# EAGLE board shieldV0ben (EAGLE 8.7.1)

Size 160 x 100 mm. Coordinates in mm from the lower left corner, seen from the top.
Outline: 0,0 160,0 160,100 0,100 0,0
Copper layers (1*16): Top 0.035mm / dielectric 1.5mm / Bottom 0.035mm
Design rules "default": minimum track width 6mil, minimum drill 0.35mm, track to track 6mil, track to pad 6mil, pad to pad 6mil, via to via 6mil, smd to smd 6mil, copper to edge 40mil, drill to drill 6mil, minimum pad ring 10mil, minimum via ring 8mil, stop-mask expansion 4mil, vias tented up to drill 0mil, thermal gap 10mil

## Footprints (pad centres in the part's own frame; a part is rotated, then mirrored left to right if it is on the bottom)
ARDUINO_MEGA_EDIT = drill 1.016 pad 1.88: 0 13.97,24.13; 1 11.43,24.13; 2 8.89,24.13; 3 6.35,24.13; 3.3V -13.97,-24.13; 4 3.81,24.13; 5 1.27,24.13; 5V@0 -11.43,-24.13; 5V@1 44.45,24.13; 5V@2 46.99,24.13; 6 -1.27,24.13; 7 -3.81,24.13; 8 -7.874,24.13; 9 -10.414,24.13; 10 -12.954,24.13; 11 -15.494,24.13; 12 -18.034,24.13; 13 -20.574,24.13; 14 19.05,24.13; 15 21.59,24.13; 16 24.13,24.13; 17 26.67,24.13; 18 29.21,24.13; 19 31.75,24.13; 20 34.29,24.13; 21 36.83,24.13; A0 1.27,-24.13; A1 3.81,-24.13; A2 6.35,-24.13; A3 8.89,-24.13; A4 11.43,-24.13; A5 13.97,-24.13; A6 16.51,-24.13; A7 19.05,-24.13; A8 24.13,-24.13; A9 26.67,-24.13; A10 29.21,-24.13; A11 31.75,-24.13; A12 34.29,-24.13; A13 36.83,-24.13; A14 39.37,-24.13; A15 41.91,-24.13; AREF -25.654,24.13; GND@0 -8.89,-24.13; GND@1 -6.35,-24.13; GND@2 44.45,-19.05; GND@3 46.99,-19.05; GND@4 -23.114,24.13; RESET -16.51,-24.13; VIN -3.81,-24.13 | hole 3.2: -34.29,24.13; -35.56,-24.13; 16.51,-19.05; 40.64,24.13; 46.99,-24.13
DPAK = smd 0.94 x 1.702: 1 -2.25,-6.109; 2 2.25,-6.109 | smd 6.655 x 7.722: 3 0,0
POWER_JACK_PTH = drill 2.997 pad 4.318: GND 0,7.7; GNDBREAK 4.7,10.7; PWR 0,13.7
2X5-SHROUDED = drill 1.016 pad 1.88: 1 -1.27,5.08; 2 1.27,5.08; 3 -1.27,2.54; 4 1.27,2.54; 5 -1.27,0; 6 1.27,0; 7 -1.27,-2.54; 8 1.27,-2.54; 9 -1.27,-5.08; 10 1.27,-5.08
0805 = smd 0.8 x 1.2: 1 -0.9,0; 2 0.9,0
0805-4K = smd 0.8 x 1.2: 1 -0.9,0; 2 0.9,0
0805-ARV_EDIT = smd 0.65 x 1: 1 -1.905,-1; 2 -0.635,-1; 3 0.635,-1; 4 1.905,-1; 5 1.905,1; 6 0.635,1; 7 -0.635,1; 8 -1.905,1
SOIC8 = smd 0.5 x 2.2: 1 -1.905,-3.154; 2 -0.645,-3.154; 3 0.625,-3.154; 4 1.895,-3.154; 5 1.905,3.154; 6 0.635,3.154; 7 -0.635,3.154; 8 -1.905,3.154
DBV5 = smd 1.473 x 0.559: 1 -1.118,0.95; 2 -1.118,0; 3 -1.118,-0.95; 4 1.118,-0.95; 5 1.118,0.95
W237-4 = drill 1.194 long: 1 -7.5,-1.27; 2 -2.5,-1.27; 3 2.5,-1.27; 4 7.5,-1.27

## Placement (x,y rotation side)
B2  ARDUINO_MEGA_R3_EDIT  [ARDUINO_MEGA_EDIT]  82.55,52.07 0 top
CR1  L7805CDT-TR  [DPAK]  50.8,62.23 180 top
J1  POWER_JACK  [POWER_JACK_PTH]  40.64,36.83 270 top
J2  AVR_SPI_PROG_5X2_NEWPTH2  [2X5-SHROUDED]  119.38,83.82 90 top
J3  AVR_SPI_PROG_5X2_NEWPTH2  [2X5-SHROUDED]  121.92,20.32 270 top
J4  AVR_SPI_PROG_5X2_NEWPTH2  [2X5-SHROUDED]  97.79,83.82 90 top
J5  AVR_SPI_PROG_5X2_NEWPTH2  [2X5-SHROUDED]  100.33,20.32 270 top
J6  AVR_SPI_PROG_5X2_NEWPTH2  [2X5-SHROUDED]  76.2,83.82 90 top
J7  AVR_SPI_PROG_5X2_NEWPTH2  [2X5-SHROUDED]  78.74,20.32 270 top
J8  AVR_SPI_PROG_5X2_NEWPTH2  [2X5-SHROUDED]  54.61,83.82 90 top
J9  AVR_SPI_PROG_5X2_NEWPTH2  [2X5-SHROUDED]  57.15,20.32 270 top
OPAMP1:R1  1k  [0805]  43.18,52.07 180 top
OPAMP1:R2  1k  [0805]  43.18,54.61 180 top
OPAMP1:R7  4k  [0805-4K]  35.56,49.53 180 top
OPAMP1:R8  4k  [0805-4K]  35.56,46.99 180 top
OPAMP1:R9  4k  [0805-4K]  35.56,44.45 0 top
OPAMP1:R10  4k  [0805-4K]  50.8,44.45 0 top
OPAMP1:RN1  4k  [0805-ARV_EDIT]  3.81,-3.81 0 top
OPAMP1:U$1  MCP6002SMT  [SOIC8]  43.18,48.26 270 top
OPAMP2:R1  1k  [0805]  64.77,52.07 180 top
OPAMP2:R2  1k  [0805]  64.77,54.61 180 top
OPAMP2:R7  4k  [0805-4K]  55.88,48.26 0 top
OPAMP2:R8  4k  [0805-4K]  55.88,45.72 0 top
OPAMP2:R9  4k  [0805-4K]  55.88,43.18 0 top
OPAMP2:R10  4k  [0805-4K]  71.12,43.18 180 top
OPAMP2:RN1  4k  [0805-ARV_EDIT]  3.81,-10.16 0 top  (outside the outline)
OPAMP2:U$1  MCP6002SMT  [SOIC8]  63.5,46.99 270 top
OPAMP3:R1  1k  [0805]  72.39,64.77 180 top
OPAMP3:R2  1k  [0805]  72.39,67.31 0 top
OPAMP3:R7  4k  [0805-4K]  64.77,62.23 0 top
OPAMP3:R8  4k  [0805-4K]  64.77,59.69 0 top
OPAMP3:R9  4k  [0805-4K]  64.77,57.15 0 top
OPAMP3:R10  4k  [0805-4K]  80.01,57.15 0 top
OPAMP3:RN1  4k  [0805-ARV_EDIT]  3.81,-16.51 0 top  (outside the outline)
OPAMP3:U$1  MCP6002SMT  [SOIC8]  72.39,59.69 270 top
OPAMP4:R1  1k  [0805]  86.36,46.99 180 top
OPAMP4:R2  1k  [0805]  86.36,49.53 180 top
OPAMP4:R7  4k  [0805-4K]  78.74,40.64 180 top
OPAMP4:R8  4k  [0805-4K]  78.74,43.18 180 top
OPAMP4:R9  4k  [0805-4K]  78.74,45.72 0 top
OPAMP4:R10  4k  [0805-4K]  93.98,38.1 0 top
OPAMP4:RN1  4k  [0805-ARV_EDIT]  3.81,-22.86 0 top  (outside the outline)
OPAMP4:U$1  MCP6002SMT  [SOIC8]  86.36,41.91 270 top
OPAMP5:R1  1k  [0805]  105.41,46.99 180 top
OPAMP5:R2  1k  [0805]  110.49,46.99 0 top
OPAMP5:R7  4k  [0805-4K]  100.33,40.64 180 top
OPAMP5:R8  4k  [0805-4K]  100.33,43.18 180 top
OPAMP5:R9  4k  [0805-4K]  100.33,45.72 180 top
OPAMP5:R10  4k  [0805-4K]  115.57,46.35 180 top
OPAMP5:RN1  4k  [0805-ARV_EDIT]  100.33,52.07 270 top
OPAMP5:U$1  MCP6002SMT  [SOIC8]  107.95,41.91 270 top
U1  TPS72101DBVT  [DBV5]  115.57,62.23 0 top
X10  [W237-4]  139.7,78.74 90 top
X11  [W237-4]  139.7,58.42 90 top
X12  [W237-4]  139.7,35.56 90 top

## Library data of the parts
B2 = SparkFun-Boards
CR1 = L7805; MANUFACTURER_PART_NUMBER: L7805CDTTR; VENDOR: STMicroelectronics
J1 = SparkFun-Connectors; PROD_ID: CONN-08197
J2-J9 = SparkFun-Connectors; PROD_ID: CONN-08671; SF_ID: PRT-08506
OPAMP1:R1 OPAMP1:R2 OPAMP1:R7-OPAMP1:R10 OPAMP1:RN1 OPAMP2:R1 OPAMP2:R2 OPAMP2:R7-OPAMP2:R10 OPAMP2:RN1 OPAMP3:R1 OPAMP3:R2 OPAMP3:R7-OPAMP3:R10 OPAMP3:RN1 OPAMP4:R1 OPAMP4:R2 OPAMP4:R7-OPAMP4:R10 OPAMP4:RN1 OPAMP5:R1 OPAMP5:R2 OPAMP5:R7-OPAMP5:R10 OPAMP5:RN1 = SparkFun-Resistors
OPAMP1:U$1 OPAMP2:U$1 OPAMP3:U$1 OPAMP4:U$1 OPAMP5:U$1 = adam - ics
U1 = TPS72101DBVT; MANUFACTURER_PART_NUMBER: TPS72101DBVT; VENDOR: Texas Instruments
X10-X12 = con-wago-500; OC_FARNELL: unknown; OC_NEWARK: unknown

## Nets
5V: B2.VIN CR1.2 U1.1 X10.1 X10.3 X11.1 X11.3 X12.4
A1O: B2.A0 OPAMP1:R1.2 OPAMP1:U$1.1
A2O: B2.A1 OPAMP2:R1.2 OPAMP2:U$1.1
A3O: B2.A2 OPAMP3:R1.2 OPAMP3:U$1.1
A4O: B2.A3
A5O: B2.A4
A6O: B2.A5 OPAMP1:R2.2 OPAMP1:U$1.7
A7O: B2.A6 OPAMP2:R2.2 OPAMP2:U$1.7
A8O: B2.A7 OPAMP3:R2.2 OPAMP3:U$1.7
A9O: B2.A8 OPAMP4:R2.2 OPAMP4:U$1.7
A10O: B2.A9 OPAMP5:R2.2 OPAMP5:U$1.7
CI: B2.4 X12.3
DI: B2.5 X12.2
GND: B2.GND@0 B2.GND@1 B2.GND@2 B2.GND@3 B2.GND@4 CR1.3 J1.GND J1.GNDBREAK J2.2 J2.4 J2.6 J2.8 J2.10 J3.2 J3.4 J3.6 J3.8 J3.10 J4.2 J4.4 J4.6 J4.8 J4.10 J5.2 J5.4 J5.6 J5.8 J5.10 J6.2 J6.4 J6.6 J6.8 J6.10 J7.2 J7.4 J7.6 J7.8 J7.10 J8.2 J8.4 J8.6 J8.8 J8.10 J9.2 J9.4 J9.6 J9.8 J9.10 OPAMP1:U$1.4 OPAMP2:U$1.4 OPAMP4:U$1.4 OPAMP5:U$1.4 U1.2 X10.2 X10.4 X11.2 X11.4 X12.1
OPAMP1:C: OPAMP1:RN1.3
OPAMP1:N$1: OPAMP1:R1.1 OPAMP1:RN1.5 OPAMP1:RN1.6 OPAMP1:RN1.7 OPAMP1:RN1.8 OPAMP1:U$1.2
OPAMP1:N$4: OPAMP1:R2.1 OPAMP1:R7.2 OPAMP1:R8.2 OPAMP1:R9.2 OPAMP1:R10.2 OPAMP1:U$1.6
OPAMP2:N$1: OPAMP2:R1.1 OPAMP2:RN1.5 OPAMP2:RN1.6 OPAMP2:RN1.7 OPAMP2:RN1.8 OPAMP2:U$1.2
OPAMP2:N$4: OPAMP2:R2.1 OPAMP2:R7.2 OPAMP2:R8.2 OPAMP2:R9.2 OPAMP2:R10.2 OPAMP2:U$1.6
OPAMP3:D1: OPAMP3:R10.1
OPAMP3:GND: OPAMP3:U$1.4
OPAMP3:N$1: OPAMP3:R1.1 OPAMP3:RN1.5 OPAMP3:RN1.6 OPAMP3:RN1.7 OPAMP3:RN1.8 OPAMP3:U$1.2
OPAMP3:N$4: OPAMP3:R2.1 OPAMP3:R7.2 OPAMP3:R8.2 OPAMP3:R9.2 OPAMP3:R10.2 OPAMP3:U$1.6
OPAMP4:A: OPAMP4:RN1.1
OPAMP4:N$1: OPAMP4:R1.1 OPAMP4:RN1.5 OPAMP4:RN1.6 OPAMP4:RN1.7 OPAMP4:RN1.8 OPAMP4:U$1.2
OPAMP4:N$4: OPAMP4:R2.1 OPAMP4:R7.2 OPAMP4:R8.2 OPAMP4:R9.2 OPAMP4:R10.2 OPAMP4:U$1.6
OPAMP4:OUT: OPAMP4:R1.2 OPAMP4:U$1.1
OPAMP5:B1: OPAMP5:R8.1
OPAMP5:C: OPAMP5:RN1.3
OPAMP5:N$1: OPAMP5:R1.1 OPAMP5:RN1.5 OPAMP5:RN1.6 OPAMP5:RN1.7 OPAMP5:RN1.8 OPAMP5:U$1.2
OPAMP5:N$4: OPAMP5:R2.1 OPAMP5:R7.2 OPAMP5:R8.2 OPAMP5:R9.2 OPAMP5:R10.2 OPAMP5:U$1.6
OPAMP5:OUT: OPAMP5:R1.2 OPAMP5:U$1.1
OPAMP5:VREG: OPAMP5:U$1.3 OPAMP5:U$1.5
S1A: J2.1 OPAMP1:RN1.1
S1B: J3.1 OPAMP1:R7.1
S2A: J2.3 OPAMP2:RN1.1
S2B: J3.3 OPAMP2:R7.1
S3A: J2.5 OPAMP3:RN1.1
S3B: J3.5 OPAMP3:R7.1
S4A: J2.7
S4B: J3.7 OPAMP4:R7.1
S5A: J2.9 OPAMP5:RN1.1
S5B: J3.9 OPAMP5:R7.1
S6A: J4.1 OPAMP1:RN1.2
S6B: J5.1 OPAMP1:R8.1
S7A: J4.3 OPAMP2:RN1.2
S7B: J5.3 OPAMP2:R8.1
S8A: J4.5 OPAMP3:RN1.2
S8B: J5.5 OPAMP3:R8.1
S9A: J4.7 OPAMP4:RN1.2
S9B: J5.7 OPAMP4:R8.1
S10A: J4.9 OPAMP5:RN1.2
S10B: J5.9
S11A: J6.1
S11B: J7.1 OPAMP1:R9.1
S12A: J6.3 OPAMP2:RN1.3
S12B: J7.3 OPAMP2:R9.1
S13A: J6.5 OPAMP3:RN1.3
S13B: J7.5 OPAMP3:R9.1
S14A: J6.7 OPAMP4:RN1.3
S14B: J7.7 OPAMP4:R9.1
S15A: J6.9
S15B: J7.9 OPAMP5:R9.1
S16A: J8.1 OPAMP1:RN1.4
S16B: J9.1 OPAMP1:R10.1
S17A: J8.3 OPAMP2:RN1.4
S17B: J9.3 OPAMP2:R10.1
S18A: J8.5 OPAMP3:RN1.4
S18B: J9.5
S19A: J8.7 OPAMP4:RN1.4
S19B: J9.7 OPAMP4:R10.1
S20A: J8.9 OPAMP5:RN1.4
S20B: J9.9 OPAMP5:R10.1
VCC: CR1.1 J1.PWR OPAMP1:U$1.8 OPAMP2:U$1.8 OPAMP3:U$1.8 OPAMP4:U$1.8 OPAMP5:U$1.8 U1.3
VREG: OPAMP1:U$1.3 OPAMP1:U$1.5 OPAMP2:U$1.3 OPAMP2:U$1.5 OPAMP3:U$1.3 OPAMP3:U$1.5 OPAMP4:U$1.3 OPAMP4:U$1.5 U1.5

## Tracks (layer width: path | path; a pad name or v marks a point on that pad's centre or on a via)
5V  (7 unrouted)
A1O  (2 unrouted)
A2O  (2 unrouted)
A3O  (2 unrouted)
A6O  (2 unrouted)
A7O  (2 unrouted)
A8O  (2 unrouted)
A9O  (2 unrouted)
A10O  (2 unrouted)
CI  (1 unrouted)
DI  (1 unrouted)
GND  (57 unrouted)
OPAMP1:N$1  (5 unrouted)
OPAMP1:N$4  (5 unrouted)
OPAMP2:N$1  (5 unrouted)
OPAMP2:N$4  (5 unrouted)
OPAMP3:N$1  (5 unrouted)
OPAMP3:N$4  (5 unrouted)
OPAMP4:N$1  (5 unrouted)
OPAMP4:N$4  (5 unrouted)
OPAMP4:OUT  (1 unrouted)
OPAMP5:N$1  (5 unrouted)
OPAMP5:N$4  (5 unrouted)
OPAMP5:OUT  (1 unrouted)
OPAMP5:VREG  (1 unrouted)
S1A  (1 unrouted)
S1B  (1 unrouted)
S2A  (1 unrouted)
S2B  (1 unrouted)
S3A  (1 unrouted)
S3B  (1 unrouted)
S4B  (1 unrouted)
S5A  (1 unrouted)
S5B  (1 unrouted)
S6A  (1 unrouted)
S6B  (1 unrouted)
S7A  (1 unrouted)
S7B  (1 unrouted)
S8A  (1 unrouted)
S8B  (1 unrouted)
S9A  (1 unrouted)
S9B  (1 unrouted)
S10A  (1 unrouted)
S11B  (1 unrouted)
S12A  (1 unrouted)
S12B  (1 unrouted)
S13A  (1 unrouted)
S13B  (1 unrouted)
S14A  (1 unrouted)
S14B  (1 unrouted)
S15B  (1 unrouted)
S16A  (1 unrouted)
S16B  (1 unrouted)
S17A  (1 unrouted)
S17B  (1 unrouted)
S18A  (1 unrouted)
S19A  (1 unrouted)
S19B  (1 unrouted)
S20A  (1 unrouted)
S20B  (1 unrouted)
VCC  (7 unrouted)
VREG  (8 unrouted)